# Altium PCB Webbie-V3.2.PcbDoc (part 3 of 3)
Units mil, origin at the board's own origin, x right, y up, seen from the top; angles counter-clockwise.
Board outline 3937.01 x 1574.8 mil, 4 copper layers (Top Layer, Layer 1, Layer 2, Bottom Layer), stack 61.865 mil thick; 123 components, 84 nets, 458 pads, 249 vias.
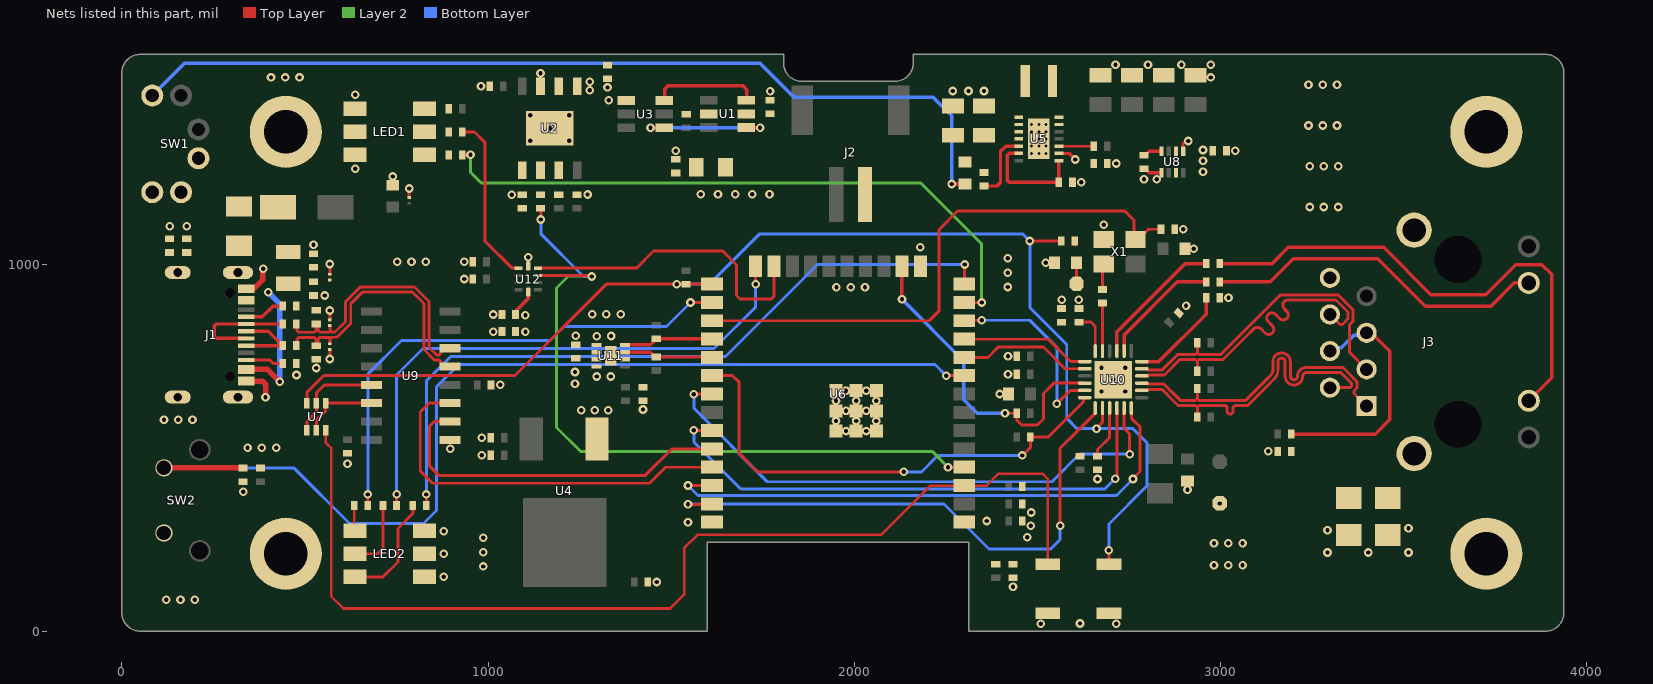
[diagram p4: the nets of this part, all layers, seen from the top]

## Via types
v1: diameter 23.62, hole 11.81, Top Layer to Bottom Layer, tented top, 249 vias

## Nets (pads, with @x,y where several pads share a name; then routed paths per layer and width w, separated by ;. In a path a pad name is that pad's centre, name@x,y a point inside that pad or via, vN(x,y) a via of type N, cw(c..) or ccw(c..) an arc to the next point about the centre after c; other vN are vias at no path point) (continued)
CLK50M: C38.2 R38.1 R41.1 TP2.1 X1.3 | length 127.2
  Top Layer w8: TP2.1@2606.63,948.6 2606.63,1005.37 C38.2@2607.01,1005.75 ; X1.3@2676.68,1002.54 2677.47,1001.75 R41.1@2677.47,933
DTR: U7.2 U7.4 U9.13 | length 272.8
  Top Layer w8: U7.4@505.41,548.13 505.41,572.77 531.01,598.36 U7.2@531.01,622.93 ; U7.2@531.21,623.14 531.21,651.12 552.63,672.53 U9.13@681.73,672.53
EN: C24.1 R27.1 SW3.2 U6.3 U7.6 | length 2894.6
  Top Layer w7: U7.6@556.6,548.13 556.6,515.63 560.7,511.53 571.7,500.52 571.7,95.3 605,62 1497,62 1535,100 1535,226.72 1571.28,263 2073,263 2207.62,397.62 U6.3@2300.16,397.62 2361.47,397.62 2393.75,429.91 2514.09,429.91 2528,416 SW3.2@2528,182.93
ETH2X_LED1: J3.10 R40.2 | length 1394.1
  Top Layer w9.5: R40.2@2997.51,1003.79 3140.62,1003.79 3184.74,1047.9 3445.22,1047.9 3574.12,919 3724,919 3806,1001 3877.12,1001 3904,974.12 3904,691.72 J3.10@3841.46,629.17
ETH2X_LED2: J3.11 R42.2 | length 950.2
  Top Layer w9.5: R42.2@2997.51,953.8 3135.44,953.8 3198.64,1017 3429,1017 3558.72,887.28 3738.28,887.28 3801.83,950.83 J3.11@3841.46,950.83
ETHERNET: R15.1 U6.14 | length 1994.8
  Top Layer w8: R15.1@831.45,343.5 v1(831.45,373.41) ; U6.14@2300.16,947.62 2301,948.46 v1(2301,1001)
  Bottom Layer w8: v1(831.45,373.41) 831.45,683.56 897.73,749.83 1648.49,749.83 1899.66,1001 v1(2301,1001)
FL: R19.1 U12.6 | length 465.5
  Top Layer w8: R19.1@929.5,1363.31 962.68,1363.31 991,1334.99 991,1065.73 1065.68,991.05 U12.6@1083.1,991.05
FULL_LED: U6.23 U12.4 | length 852.1
  Top Layer w8: U12.4@1136.25,991.05 1405,991.05 1451.65,1037.69 1640.63,1037.69 1678.29,1000.03 1678.29,916.71 1688.12,906.88 1772.92,906.88 1780.47,914.44 U6.23@1780.47,996.83
GND: C2.2 C3.1 C4.2 C5.2 C6.1 C7.1 C8.1 C9.2 C10.2 C11.1 C12.1 C13.1 C14.1 C15.1 C16.1 C17.1 C18.1 C19.1 C20.2 C21.1 C22.1 C23.1 C24.2 C25.1 C26.1 C27.1 C28.2 C29.2 C30.1 C31.2 C32.1 C33.2 C34.2 C35.2 C36.1 C37.1 C38.1 C39.1 C40.1 C41.1 C43.2 D1.2 D4.1 D6.1 D7.1 J1.A1B12 J1.B1A12 J3.8 LED2.2 LED2.4 LED2.6 pad.10 R2.1 R3.1 R4.2 R5.1 R7.1 R17.2 R18.2 R21.2 R24.1 R43.1 R45.2 R46.1 R50.1 SW1.1 SW2.2 SW3.1 SW4.1 TP3.1 U2.1 U2.3 U2.9 U3.1 U4.1 U5.2 U5.15 U6.1 U6.15 U6.38 U6.39 U6.39_10 U6.39_11 U6.39_12 U6.39_13 U6.39_14 U6.39_15 U6.39_16 U6.39_17 U6.39_18 U6.39_19 U6.39_20 U6.39_21 U6.40 U6.41 U6.42 U6.43 U6.44 U6.45 U6.46 U6.47 U8.1 U8.5 U9.1 U10.25 U11.1 U11.4 U11.9 U12.5 X1.2 | length 405.4
  Top Layer w8: D1.2@567.91,974.42 567.95,974.47 v1(568,1002.65) v1(568,1002.65) ; v1(568,743) D7.1@568,768.89 ; D6.1@568,850.15 v1(568,875.78) ; D4.1@784.33,1184.32 v1(784.33,1208.55) ; U5.2@2558.81,1304.66 2586.6,1304.66 v1(2603.44,1287.82) ; U8.1@2897.91,1310.27 2897.91,1332.01 2904.16,1338.27 v1(2911.69,1338.27)
  Top Layer w9.5: R17.2@2790.86,1262.63 2794.36,1262.63 2804.99,1252 U8.5@2838.85,1252
  Top Layer w15: J1.B1A12@339.29,683.19 339.87,682.6 383.39,682.6 392.22,673.78 v1(392.22,638.66) ; J1.A1B12@339.29,935.16 J1.A1B12@344.38,935.16 ; 361.93,936.92 384.14,959.13 384.14,987.58 v1(385.79,989.23)
  other v1: 2509,20 2715,20 2616,21 121,86 160,86 199,86 2433,121.46 1460.06,134.47 879,148.5 987,176.8 2982,180 3021,180 3060,180 879,211.5 3292,215 3403,215 3513,215 987,215.8 2982,240 3021,240 3060,240 987,254.8 2472.12,256.23 879,273 3292,276 3513,281.09 2482.04,288.11 1545.57,297.62 2361.47,300.88 2482.96,324.11 2997.51,348.8 331.11,380.46 2909.78,386.58 2663.76,415.33 615.86,457.42 982.92,480.49 3130.28,491 896.27,498.49 343.25,500.52 382.25,500.52 421.25,500.52 982.84,528.01 114.84,577 153.84,577 192.84,577 1254.33,603.5 1291.33,603.5 1328.33,603.5 1423.05,605.32 2397.01,647.66 2674.63,654.63 2739.37,654.63 1033.07,672.54 2707,687 1296.4,695.2 1335.25,695.2 476.67,699.52 2419.46,701.55 530.83,718.42 2674.63,719.37 2739.37,719.37 2419.46,750.63 1296.28,805.57 1335.74,805.91 1239.41,806.5 1013.8,817.83 1013.8,864.84 1284,865.44 1323,865.44 1362,865.44 2905.73,888.63 2565.99,905.03 2613.01,905.04 3021.54,910.31 553.65,916.64 1951,939 1990,939 2029,939 2418.56,939.81 934.46,961.52 2418.56,978.81 2522.96,1005.75 751.97,1008.53 790.97,1008.53 829.97,1008.53 934.45,1008.53 2418.56,1017.81 1109.68,1020.99 2926.62,1044.26 2180.3,1048.39 523.08,1054.69 2898.42,1097.35 130.39,1106 177.48,1106 2681.16,1109.85 3243,1158 3282,1158 3321,1158 2619.58,1225.93 2790.86,1233.78 2826.01,1233.78 739.47,1241.59 3243,1269.33 3282,1269.33 3321,1269.33 2714.81,1277 1512.45,1312.15 3040.05,1311.57 1115,1339.46 1221.2,1339.46 1168.04,1373.35 3240,1380.67 3279,1380.67 3318,1380.67 1115,1409 1221.2,1409 1329.37,1449.4 1769.89,1473.88 2269,1475 2311.51,1475 2354.01,1475 1277.66,1476.56 1325.83,1484.68 980.49,1487.85 3240,1492 3279,1492 3318,1492 1277.66,1499.72 407,1512 446,1512 485,1512 2973,1512 1143.04,1523.6 2712.91,1547 2801.63,1547 2893,1547 2973,1547
IO0: R30.1 R38.2 SW4.2 U6.25 U7.3 U10.14 | length 3582.1
  Top Layer w8: U7.3@505.41,622.93 505.41,652.35 551.42,698.35 1073.63,698.35 1322.77,947.5 1514.88,947.5 v1(1515,947.38) 1515.06,947.44 1539.94,947.44 R30.1@1540,947.5 ; R30.1@1540.12,947.38 U6.25@1611.18,947.38 ; v1(2478.83,1065.26) 2564.51,1065.26 R38.2@2564.88,1065.63 ; v1@2661.24,553.11 2661.24,553.83 2677.59,570.19 U10.14@2677.59,609.1 ; SW4.2@2695.12,183.05 v1@2695.12,220.88
  Bottom Layer w8: v1(1515,947.38) 1603.95,947.38 1741.57,1085 2459.09,1085 v1(2478.83,1065.26) 2479,1065.09 2479,884.01 2579.88,783.13 2579.88,581.36 2608.25,552.99 v1(2661.12,552.99) ; v1@2661.24,552.87 2760.68,552.87 2798.87,514.68 2798.87,396.87 2695,293 v1(2695,221)
IO4: R26.1 U6.26 | length 1378.9
  Top Layer w8: R26.1@671.45,343.5 v1(671.45,373.41) ; v1(1552.62,897.62) U6.26@1611.18,897.62
  Bottom Layer w8: v1(671.45,373.41) 671.45,701.45 763.5,793.5 1168.77,793.5 1207.54,832.27 1487.27,832.27 v1(1552.62,897.62)
IO13_RMII_EMAC_RX_ER: R39.1 U6.16 U10.10 | length 894.4
  Top Layer w8: v1@2410.4,594.18 v1(2411.21,594.99) R39.1@2443.51,595 ; R39.1@2443.19,594.68 2444.53,593.33 2444.53,575.19 2457.1,562.62 2499.12,562.62 2516.17,579.66 2516.17,649.05 2544.28,677.16 U10.10@2629.22,677.16
  Top Layer w9.5: v1(2130,906) 2130,996.36 U6.16@2130.47,996.83
  Bottom Layer w9.5: v1(2130,906) 2298.65,737.35 2298.65,631.77 2335.43,594.99 v1(2411.21,594.99)
IO16_OSC_EN: R45.1 U6.27 X1.1 | length 1554.6
  Top Layer w8: U6.27@1611.18,847.62 2204.62,847.62 2231.62,874.62 2231.62,1096.75 2281.87,1147 2738,1147 2763.3,1121.7 2763.3,1069.46 2782.92,1089.09 2795.1,1089.09 2803.36,1097.35 R45.1@2837.38,1097.35
IO18_RMII_MDIO: R36.1 U6.30 U10.12 | length 1348.4
  Top Layer w8: U6.30@1611.18,697.62 1667.35,697.62 1685.51,679.45 1685.51,484.89 1735.4,435 v1(2135,435) ; v1(2458,479.91) 2459.44,479.91 2480.5,500.96 R36.1@2480.5,529.91 2529.37,529.91 2625.23,625.76 2625.23,637.13 2625.88,637.79 U10.12@2629.22,637.79
  Bottom Layer w8: v1(2135,435) 2183,435 2227.91,479.91 v1(2458,479.91)
IO19_RMII_EMAC_TXD0: U6.31 U10.17 | length 1524
  Top Layer w8: v1(1561.9,647.1) 1610.66,647.1 U6.31@1611.18,647.62 ; U10.17@2736.53,609.22 2736.53,553.82 2751.5,538.85 v1(2751.5,483.44)
  Bottom Layer w8: v1(1561.9,647.1) 1561.9,608.5 1762.41,407.99 2539.55,407.99 2615.01,483.44 v1(2751.5,483.44)
IO21_RMII_EMAC_TX_EN: U6.33 U10.16 | length 1491.5
  Top Layer w8: v1(1561.9,548.26) 1610.55,548.26 U6.33@1611.18,547.62 ; v1(2712.13,416.52) 2712.13,420.74 2716.84,425.45 U10.16@2716.84,609.22
  Bottom Layer w8: v1(1561.9,548.26) 1561.9,516.09 1689.99,388 2683.62,388 v1(2712.13,416.52)
IO22_RMII_EMAC_TXD1: U6.36 U10.18 | length 1518.8
  Top Layer w8: v1(1545.57,397.62) U6.36@1607.68,397.62 ; U10.18@2756.21,609.22 2756.21,581.64 2779.54,558.32 2779.54,436.04 2760.92,417.42 v1(2760.92,415.33)
  Bottom Layer w8: v1(1545.57,397.62) 1572.98,370.21 2715.81,370.21 v1(2760.92,415.33)
IO23_RMII_MDC: U6.37 U10.13 | length 1543.6
  Top Layer w8: v1(1545.57,346.25) 1609.81,346.25 U6.37@1611.18,347.62 ; v1(2561.86,288.11) 2561.86,499.18 2610.07,547.39 ; 2610.12,547.39 2657.79,595.06 U10.13@2657.79,609.22
  Bottom Layer w8: v1(1545.57,346.25) 1546.32,347 2244.42,347 2367.42,224 2536.1,224 2561.86,249.76 v1(2561.86,288.11)
IO25_RMII_EMAC_RXD0: U6.10 U10.8 | length 365.2
  Top Layer w8: U6.10@2300.16,747.62 2364.62,747.62 2392.69,775.69 2516.17,775.69 2575.33,716.53 U10.8@2629.22,716.53
IO26_RMII_EMAC_RXD1: U6.11 U10.7 | length 354.5
  Top Layer w8: U6.11@2300.16,797.62 2300.78,797 2529.31,797 2590.09,736.21 U10.7@2629.22,736.21
IO27_RMII_EMAC_CRS_DV: U6.12 U10.11 | length 531.9
  Top Layer w8: U6.12@2302.78,845 2306.78,849 v1(2347.58,849) ; v1(2552.83,620.8) 2589.5,657.47 U10.11@2629.22,657.47
  Top Layer w9.5: U6.12@2300.16,847.62 U6.12@2302.78,845
  Bottom Layer w8: v1(2347.58,849) 2479,849 2552.83,775.17 v1(2552.83,620.8)
IO33: C10.1 R20.1 SW2.1 U6.9 | length 2854.7
  Top Layer w8: v1(2250.62,697.62) U6.9@2300.16,697.62
  Top Layer w9.5: C10.1@330.86,445.75 C10.1@331.11,445.5
  Top Layer w15: SW2.1@115.08,445.75 C10.1@330.86,445.75
  Bottom Layer w8: SW2.1@114.84,446 469.47,446 621.29,294.17 823.71,294.17 858.94,329.4 858.94,667.1 920.22,728.38 2219.87,728.38 v1(2250.62,697.62)
"LOW BATT": R9.1 U6.13 | length 1753.8
  Top Layer w8: R9.1@929.49,1300.32 929.58,1300.41 v1(951.91,1300.41) ; U6.13@2300.16,897.62 v1(2347.58,897.62)
  Layer 2 w8: v1(951.91,1300.41) 951.91,1252.93 981.11,1223.73 2181.19,1223.73 2347.58,1057.35 v1(2347.58,897.62)
NetC1_1: C1.1 R1.1 U1.5
NetC6_2: C6.2 J1.13 R7.2
NetC20_1: C20.1 U5.1 U5.13 | length 304.7
  Top Layer w9.5: U5.13@2448.57,1304.66 2422.7,1304.66 2416.8,1298.77 2416.8,1231.5 2422.37,1225.93 C20.1@2558.53,1225.93 2558.67,1226.07 U5.1@2558.67,1284.95 ; U5.1@2558.7,1284.97 U5.1@2558.81,1284.97
NetC39_2: C39.2 J3.4 J3.5 R44.1 | length 677.3
  Top Layer w9.5: R44.1@3192.5,538 3422,538 3462,578 3462,764 3424.91,801.09 3424.58,801.09 3410.87,814.8 J3.5@3398.54,814.8
  Bottom Layer w9.5: J3.4@3298.54,764.8 3307.26,773.52 3329.58,773.52 3364.67,808.61 3392.35,808.61 J3.5@3398.54,814.8
NetC40_2: "J3.Shield 1" "J3.Shield 2" C40.2 R46.2
NetD5_2: D5.2 FB1.2
NetF1_2: F1.2 FB1.1
NetJ1_A5: J1.A5 R2.2 | length 111.7
  Top Layer w10: J1.A5@339.29,858.39 383.39,858.39 412.5,887.5 R2.2@438.97,887.5
NetJ1_A6: J1.A6 J1.B6 R23.2 | length 215.7
  Top Layer w9.5: J1.B6@339.29,779.65 R23.2@439,779.65 399.63,819.02 J1.A6@339.29,819.02
NetJ1_A7: J1.A7 J1.B7 R22.2 | length 307.5
  Top Layer w9.5: J1.A7@339.29,799.33 257.25,799.33 251.69,804.89 251.69,832.72 257.66,838.7 R22.2@439,838.7
NetJ1_B5: J1.B5 R5.2 | length 103.7
  Top Layer w8: J1.B5@339.29,740.28 403.8,740.28 413.57,730.5 R5.2@438.98,730.5
NetL1_1: L1.1 U5.8 U5.9
NetL1_2: L1.2 U5.6 U5.7
NetLED1_2: LED1.2 R9.2
NetLED1_4: LED1.4 R19.2
NetLED1_6: LED1.6 R13.2
NetLED2_1: LED2.1 R15.2 | length 304.7
  Top Layer w8: LED2.1@636.97,148.5 712.96,148.5 753.71,189.25 753.71,280.71 794.45,321.45 R15.2@794.45,343.5
NetLED2_3: LED2.3 R25.2 | length 199.5
  Top Layer w8: LED2.3@636.97,211.5 698.5,211.5 712.96,225.96 R25.2@712.96,343.5
NetLED2_5: LED2.5 R26.2 | length 70.1
  Top Layer w8: R26.2@634.45,343.5 634.45,277.01 LED2.5@636.97,274.49
NetR3_2: R3.2 U1.2
NetR4_1: R4.1 U2.2
NetR10_2: R10.2 U2.6
NetR11_2: R11.2 U2.7
NetR14_1: R14.1 R24.2 U5.3 | length 94.3
  Top Layer w7: U5.3@2558.81,1324.34 R14.1@2653.1,1324.34
NetR17_1: R17.1 U8.4 | length 52.4
  Top Layer w9.5: R17.1@2790.86,1299.63 2794.36,1299.63 2804.99,1310.27 U8.4@2838.85,1310.27
NetR40_1: R40.1 U10.3 | length 373.2
  Top Layer w9.5: U10.3@2716.84,764.78 2716.88,764.82 2716.88,817 2903.67,1003.79 R40.1@2960.51,1003.79
NetR42_1: R42.1 U10.2 | length 327.9
  Top Layer w9.5: R42.1@2960.51,953.8 2881.78,953.8 2736.57,808.59 U10.2@2736.57,764.82 ; U10.2@2736.53,764.78 U10.2@2736.57,764.82
NetR43_2: R43.2 U10.24 | length 274.3
  Top Layer w9.5: U10.24@2784.78,736.21 2831.62,736.21 2960.5,865.09 R43.2@2960.5,910.31
NetR50_2: R50.2 U11.6
NetU1_1: U1.1 U3.4 | length 373.9
  Top Layer w9.5: v1(1443.18,1374.6) U3.4@1480.57,1374.6 ; U1.1@1705.2,1374.9 v1(1742.6,1374.9)
  Bottom Layer w9.5: v1@1443.48,1374.9 v1(1742.6,1374.9)
NetU1_3: U1.3 U3.6 | length 292
  Top Layer w9.5: U3.6@1480.57,1449.4 1482.85,1451.68 1482.85,1480.58 1492.07,1489.79 1694.75,1489.79 1705.69,1478.85 U1.3@1705.69,1450.19
nRST: C36.2 R37.1 U10.15 | length 145.5
  Top Layer w8: C36.2@2663.76,477.55 2663.76,495.79 2697.16,529.18 U10.15@2697.16,609.22
OR_3.3V: C11.2 C27.2 C41.2 LED1.1 LED1.3 LED1.5 R6.2 R8.2 SW1.2 SW1.5 U8.2 U8.7 U12.10 | length 75.7
  Top Layer w10: C27.2@1074.84,864.84 1078.84,868.84 1078.84,877.63 1109.59,908.38 1109.59,926 U12.10@1109.68,926.08
  other v1: 1101.86,817.83 1101.86,862.89 1064.48,1191.78 1271.57,1192.22 2951.9,1254.59 636.97,1262.31 2951.9,1284.15 2951.9,1313.72 636.97,1464.31
OSCIN: R41.2 U10.5 | length 131.2
  Top Layer w8: U10.5@2677.47,764.78 R41.2@2677.47,896
OUT/BATT+: C3.2 C19.2 C25.2 C43.1 J2.1 R1.2 R12.1 R16.2 U2.5 U5.10 U5.11 U11.2 U11.3
  other v1: 1237.03,675.49 1237.03,707.53 1580.69,1192.78 1627.64,1192.78 1674.59,1192.78 1721.55,1192.78 1768.5,1192.78
RST: R12.2 R16.1 SW1.3 U5.12 | length 2690.5
  Top Layer w9.5: R12.2@2354.01,1215.5 2389.57,1215.5 2399,1224.93 2399,1310 2413.34,1324.34 U5.12@2448.57,1324.34
  Top Layer w10: v1(2265.94,1221) R16.1@2302,1221
  Bottom Layer w10: SW1.3@83,1462.44 171.1,1550.54 1742.57,1550.54 1835.1,1458 2215,1458 2265.94,1407.06 v1(2265.94,1221)
RTS: U7.1 U7.5 U9.14 | length 209.9
  Top Layer w8: U7.5@531.01,548.13 531.01,576.05 556.6,601.65 556.6,622.13 557,622.53 U9.14@681.73,622.53
RX_N: J3.6 R35.1 U10.22 | length 897.4
  Top Layer w8: U10.22@2784.78,696.84 2799.37,696.84 2802.21,699.69 2846.64,699.69 2888.63,741.67 2931.81,741.67 2936.49,736.98 ; R35.1@2936.49,709.84 2936.49,736.98 ; J3.6@3298.54,864.8 3325.83,837.51 3332.46,837.51 3348.02,853.07 3348.02,871.21 3314.91,904.32 3195.85,904.32 3183.86,904.32 ccw(c3183.86,890.32) 3173.96,880.42 3180.75,873.64 cw(c3170.85,863.74) 3180.75,853.84 cw(c3170.85,863.74) 3160.95,853.84 3149.69,865.09 ccw(c3139.79,855.19) 3129.89,865.09 ccw(c3139.79,855.19) 3129.89,845.3 3141.15,834.04 cw(c3131.25,824.14) 3141.15,814.24 cw(c3131.25,824.14) 3121.35,814.24 3110.09,825.5 ccw(c3100.19,815.6) 3090.3,825.5 3067.67,802.87 3014.67,749.87 3006.47,741.67 2941.18,741.67 2936.49,736.98
RX_P: J3.3 R34.1 U10.23 | length 897.3
  Top Layer w8: U10.23@2784.78,716.53 2799.37,716.53 2802.21,713.69 2840.85,713.69 2882.83,755.67 2931.81,755.67 2936.49,760.35 ; R34.1@2936.49,787.49 2936.49,760.35 ; J3.3@3398.54,714.8 3351.61,761.74 3351.61,836.86 3362.02,847.27 3362.02,877.01 3320.71,918.32 3163.32,918.32 3000.67,755.67 2941.18,755.67 2936.49,760.35
RXD: U6.34 U9.2 | length 981.3
  Top Layer w8: U9.2@896.27,572.53 853.14,572.53 840.45,559.84 840.45,450.52 865.4,425.57 1429.26,425.57 1501.3,497.62 U6.34@1611.18,497.62
SCL: R33.1 U6.29 U11.7 | length 242.8
  Top Layer w9.5: U11.7@1374.23,761.84 1442.54,761.84 1455.75,748.63 1610.17,748.63 U6.29@1611.18,747.62
SDA: R32.1 U6.28 U11.8 | length 249.7
  Top Layer w9.5: U11.8@1374.23,781.53 1442.49,781.53 1451.5,790.54 1451.5,794.04 R32.1@1455.75,798.29 ; R32.1@1459.25,798.29 R32.1@1455.75,798.29 ; U6.28@1611.18,797.62 1610.52,798.29 R32.1@1455.75,798.29
STDBY: R6.1 R10.1 U6.4 U12.3 | length 2055.7
  Top Layer w8: U12.3@1136.25,971.36 1136.31,971.3 1279.92,971.3 v1(1282.77,968.45) ; v1(1144,1124) 1144,1152.56 R10.1@1146.44,1155 ; v1(2255.76,447.62) U6.4@2300.16,447.62
  Layer 2 w8: v1(1282.77,968.45) 1281.08,970.14 1219.47,970.14 1186.6,937.26 1186.6,556.4 1252,491 2212.38,491 v1(2255.76,447.62)
  Bottom Layer w8: v1(1144,1124) 1144,1085 1260.55,968.45 v1(1282.77,968.45)
TX_N: J3.2 R29.1 U10.20 | length 890.8
  Top Layer w8: U10.20@2784.78,657.47 2799.37,657.47 2802.21,660.31 2839.86,660.31 2883.82,616.35 2931.81,616.35 2936.5,611.67 ; R29.1@2936.49,584.53 2936.49,611.67 ; J3.2@3298.54,664.8 3353.29,664.8 3357.97,669.49 3357.97,676.12 3328.09,706 3276.74,706 3234.07,706 ccw(c3234.07,696.09) 3224.17,696.09 cw(c3200.26,696.09) 3200.26,672.19 cw(c3200.26,696.09) 3176.36,696.09 3176.36,735.72 ccw(c3166.45,735.72) 3166.45,745.63 ccw(c3166.45,735.72) 3156.54,735.72 3156.54,713.58 cw(c3120.69,713.58) 3146.15,688.33 cw(c3120.67,713.57) 3146.09,688.28 3130.09,672.28 3082.37,624.56 3074.17,616.35 3060.36,616.35 3041.74,616.35 ccw(c3041.74,608.35) 3033.74,608.35 3033.74,600.79 cw(c3025.8,600.79) 3017.87,600.79 3017.87,608.35 ccw(c3009.87,608.35) 3009.87,616.35 2989.99,616.35 2941.18,616.35 2936.49,611.67
TX_P: J3.1 R28.1 U10.21 | length 890.9
  Top Layer w8: U10.21@2784.78,677.16 2799.37,677.16 2802.21,674.31 2845.66,674.31 2889.62,630.35 2931.81,630.35 2936.5,635.04 ; R28.1@2936.5,662.18 2936.5,635.04 ; J3.1@3398.54,614.8 3364.13,649.22 3364.13,655.84 3371.97,663.69 3371.97,681.92 3333.89,720 3276.74,720 3234.07,720 ccw(c3234.07,696.09) 3210.17,696.09 cw(c3200.26,696.09) 3200.26,686.19 cw(c3200.26,696.09) 3190.36,696.09 3190.36,735.72 ccw(c3166.45,735.72) 3166.45,759.63 ccw(c3166.45,735.72) 3142.54,735.72 3142.54,713.58 cw(c3120.69,713.58) 3136.21,698.19 cw(c3120.67,713.57) 3136.17,698.15 3130.09,692.08 3068.37,630.35 3060.37,630.35 2955.99,630.35 2941.18,630.35 2936.5,635.04
TXD: U6.35 U9.3 | length 1081.2
  Top Layer w8: U9.3@896.27,622.53 838.67,622.53 814.78,598.65 814.78,437.09 847.96,403.92 1440.4,403.92 1484.1,447.62 U6.35@1611.18,447.62
USB_N: C13.2 D6.2 R22.1 U9.6 | length 738
  Top Layer w8: R22.1@476,838.7 478.29,836.41 478.29,820.86 482.97,816.17 502.09,816.17 502.15,816.12 525.96,816.12 530.64,820.81 530.64,838.59 C13.2@530.83,838.78 531.01,838.78 536.01,833.78 536.01,820.94 540.69,816.25 564.78,816.25 568,819.47 568,821.21 ; D6.2@568,834.41 568,821.21 ; U9.6@896.27,772.53 878.5,772.53 871.5,765.53 871.5,759.22 866.81,754.53 858.94,754.53 838.76,774.71 838.76,900.23 798.9,940.1 651.3,940.1 650.4,939.2 611,899.8 611,845.82 581.7,816.52 572.69,816.52 568,821.21
USB_P: C14.2 D7.2 R23.1 U9.5 | length 738
  Top Layer w8: R23.1@476,779.65 478.29,781.93 478.29,797.49 482.97,802.17 496.29,802.17 496.35,802.12 525.96,802.12 530.64,797.43 530.64,779.65 C14.2@530.83,779.46 531.01,779.46 536.01,784.46 536.01,797.57 540.69,802.25 565.32,802.25 568,799.58 568,797.84 ; D7.2@568,784.64 568,797.84 ; U9.5@896.27,722.53 878.5,722.53 871.5,729.53 871.5,735.84 866.81,740.53 853.14,740.53 824.76,768.91 824.76,894.44 793.1,926.1 657.1,926.1 656.2,925.2 625,894 625,840.03 587.5,802.52 572.69,802.52 568,797.84
VDDCR: C32.2 C33.1 U10.6 | length 117
  Top Layer w8: C32.2@2613,844 2645.75,844 2657.79,831.96 U10.6@2657.79,764.78
VUSB: C4.1 C5.1 D1.1 F1.1 J1.A4B9 J1.B4A9 | length 362.7
  Top Layer w15: J1.B4A9@339.29,714.69 397.27,714.69 v1(430.78,681.18)
  Bottom Layer w15: v1(399.63,925.64) 430.78,894.49 v1(430.78,681.18)
WIFI: R25.1 U6.24 | length 1525.3
  Top Layer w8: R25.1@749.96,343.5 750.06,343.6 750.06,373.41 v1(750.16,373.51) ; v1(1730.47,947.38) U6.24@1730.47,996.83
  Bottom Layer w8: v1(750.16,373.51) 749.96,373.71 749.96,699.83 822.13,772 1617,772 1730.47,885.47 v1(1730.47,947.38)
pads on no net: J1.7 J1.8 J1.A8 J1.B8 J2.3 J2.4 J3.7 J3.MH1 J3.MH2 SW2.3 SW2.4 U1.4 U3.2 U3.5 U5.14 U6.7 U6.17 U6.18 U6.19 U6.20 U6.21 U6.22 U6.32 U8.8 U9.7 U9.8 U9.9 U9.10 U9.11 U9.12 U9.15 U10.4

## Polygon pours and split planes (outlines as drawn)
GND on Top Layer "NONET_L-01_P-001" (solid, remove dead copper, pour order 47): 10,50 50,10 1590,10 1590,255 2323.68,255 2325,253.68 2325,10 3890,10 3925,45 3925,1525 3885,1565 2235.39,1565 2149.79,1479.4 1806.6,1479.4 1726,1560 50,1560 10,1520
OUT/BATT+ on Top Layer "NONET_L-01_P-001" (solid, pour order 38): 1037.57,1215 1057.78,1235.22 1104.85,1235.22 1104.85,1282.46 1028.46,1282.46 1004.5,1258.5 1004.5,1090.07 1037.57,1057 2034.76,1057 2048.68,1070.93 2048.68,1243.18 2009.32,1243.18 2009.32,1117.2 2009.31,1085 1061.54,1085 1037.57,1108.97
OUT/BATT+ on Top Layer "NONET_L-01_P-001" (solid, pour order 37): 1500.06,1242 1500.06,1192.97 1515.03,1178 1838.32,1178 1857.1,1196.78 1857.1,1276.1 1879.76,1298.76 2009.32,1298.76 2009.32,1117.2 2048.68,1117.2 2048.68,1222.83 2091.85,1266 2341.51,1266 2341.51,1243.5 2366.51,1243.5 2366.51,1316.5 2389.31,1339.31 2460.39,1339.31 2460.39,1368.44 2389.57,1368.44 2384.01,1374 2239,1374 2198,1333 1858.77,1333 1812.76,1286.99 1812.76,1220.69 1594.33,1220.69 1588.02,1227 1588.02,1292 1548.02,1292 1548.02,1267 1541.12,1260.11 1499.95,1260.11 1499.95,1242.11
3.3V_ESP on Top Layer "NONET_L-01_P-001" (solid, pour order 34): 2735.74,1026.16 2791.97,1026.16 2827.57,1061.76 2857.57,1061.76 2857.57,1026.76 2809.72,978.91 2735.74,978.91
NetC40_2 on Top Layer "NONET_L-01_P-001" (solid, pour order 33): 3314.99,393 3437,393 3480.58,436.58 3480.58,524.15 3489.63,533.21 3567.29,533.21 3576.59,523.91 3576.59,363 3546.59,333 3314.99,333
B- on Top Layer "NONET_L-01_P-001" (solid, pour order 32): 1401.44,1329.85 1407.59,1336 1617,1336 1626.07,1345.07 1626.07,1387.1 1578.04,1387.1 1574.88,1383.94 1528.67,1383.94 1528.67,1361.82 1522.12,1355.27 1407.59,1355.27 1401.44,1361.42 1401.44,1386.8 1353.41,1386.8 1353.41,1175.59 1411.8,1117.2 1969.95,1117.2 1969.95,1266.8 1930.58,1266.8 1930.58,1174.58 1918,1162 1438.59,1162 1401.44,1199.15
AVDD on Top Layer "NONET_L-01_P-001" (solid, pour order 27): 2770.57,642.5 2770.57,633.08 2784.78,633.08 2813.96,603.89 2813.96,546.22 2798.75,531 2798.75,455.89 2927.28,455.89 2927.28,536.58 2821.36,642.5
NetR50_2 on Top Layer "NONET_L-01_P-001" (solid, pour order 31): 1360.45,748.06 1360.45,736.25 1399.58,736.25 1410.55,725.28 1410.55,657.36 1435.55,657.36 1435.55,730.13 1417.62,748.06
AVDD on Top Layer "NONET_L-01_P-001" (solid, pour order 29): 2784.32,807.09 2841.86,807.09 2874.7,839.93 2857.02,857.61 2830.52,831.11 2779.24,831.11 2751.5,803.38 2751.5,745.86 2760.92,745.86 2760.92,783.7
NetL1_2 on Top Layer "NONET_L-01_P-001" (solid, pour order 22): 2547,1378.68 2581.93,1378.68 2581.93,1517.27 2553.89,1545.31 2528.3,1545.31 2528.3,1456.7 2547,1438
NetL1_1 on Top Layer "NONET_L-01_P-001" (solid, pour order 23): 2460.39,1378.68 2424.98,1378.68 2424.98,1516.79 2453.5,1545.31 2479.09,1545.31 2479.09,1456.7 2460.39,1438
OR_3.3V on Top Layer "NONET_L-01_P-001" (solid, pour order 19): 2911.69,1270.56 2940.93,1241.32 2987.9,1241.32 2987.9,1326.02 2945.61,1326.02 2911.91,1292.53 2887.29,1292.53 2884.13,1295.69 2884.13,1323.46 2872.32,1323.46 2872.32,1238.81 2884.13,1238.81 2884.13,1266.36 2888.33,1270.56
+3V3_BATT on Top Layer "NONET_L-01_P-001" (solid, pour order 6): 2944.18,1418 2961,1418 2961,1458 2642.27,1458 2642.27,1407.27 2603.44,1368.44 2547,1368.44 2547,1339.31 2621.14,1339.31 2627.44,1345.61 2674.42,1345.61 2681.77,1338.27 2681.77,1311.59 2699.77,1311.59 2699.77,1338.27 2726.05,1364.55 2826.01,1364.55 2852.63,1337.92 2852.63,1297.08 2864.45,1297.08 2864.45,1338.27
NetC1_1 on Top Layer "NONET_L-01_P-001" (solid, pour order 4): 1632.5,1400.09 1641.37,1391.23 1641.37,1308.35 1628.02,1295 1628.02,1242 1668.02,1242 1668.02,1415.16 1658.67,1424.5 1532.23,1424.5 1528.67,1420.94 1528.67,1402.94 1531.52,1400.09
VUSB on Top Layer "NONET_L-01_P-001" (solid, pour order 0): 545.04,962.64 535.58,972.09 535.58,1002.65 510.58,1002.65 510.58,984.65 494.21,968.27 426.47,968.27 373.67,915.47 316.65,915.47 316.65,891.85 383.6,891.85 420.65,928.9 487.48,928.9 503.21,944.64 534.8,944.64 544.9,954.74 572.63,954.74 572.63,962.61 572.61,962.64
NetF1_2 on Top Layer "NONET_L-01_P-001" (solid, pour order 2): 487.48,1015.52 487.48,1080.02 284.1,1080.02 284.1,1024.9 411.17,1024.9 420.55,1015.52
+5V_OUT on Top Layer "NONET_L-01_P-001" (solid, pour order 1): 534.53,1191.48 534.53,1093 789.06,1093 789.06,1172.51 757.01,1172.51 756.97,1172.55 651.88,1172.55 632.95,1191.48
GND on Layer 1 "NONET_L-01_P-001" (solid, remove dead copper, pour order 35): 50,10 1590,10 1590,255 2325,255 2325,10 3890,10 3925,45 3925,1525 3885,1565 2235.39,1565 2149.79,1479.4 1806.6,1479.4 1726,1560 50,1560 10,1520 10,50
AVDD on Layer 2 "NONET_L-01_P-001" (solid, pour order 43): 2809.04,542.04 2816.45,549.45 2823.38,549.45 2953.45,549.45 2963.09,559.09 2963.09,631.45 2995.06,663.42 2995.06,706.14 2970.59,730.6 2970.59,802.15 2965.65,807.09 2825.36,807.09 2821.36,811.1 2821.36,831.11 2825.79,835.54 2985.46,835.54 2993.99,827.01 2993.99,763.36 3027,730.35 3027,643.42 2995.07,611.5 2995.07,558.75 3003.32,550.5 3134.95,550.5 3141.31,544.14 3141.31,528.03 3136.28,523 3021.07,523 3014.17,516.11 3014.17,470.83 3092,393 3731,393 3759,421 3759,1062.45 3780.55,1084 3871.05,1084 3882,1073.06 3882,1019.03 3872.24,1009.27 3816.41,1009.27 3795,987.85 3795,581.34 3811.34,565 3868,565 3882,551 3882,501 3869,488 3814.22,488 3801,474.78 3801,405 3759,363 3075.48,363 2982.44,456.04 2982.44,516.91 2976.35,523 2816,523 2809.04,529.96
OUT/BATT+ on Layer 2 "NONET_L-01_P-001" (solid, pour order 41): 1223.33,662.93 1251.83,662.93 1251.83,728.38 1401.6,728.38 1426.58,753.37 1426.58,1057.95 1546.63,1178 1780.47,1178 1780.47,1206 1778.47,1208 1537,1208 1399.58,1070.58 1399.58,761.84 1392.2,754.46 1234.83,754.46 1223.33,742.96
+5V_OUT on Layer 2 "NONET_L-01_P-001" (solid, pour order 36): 1046,1262.97 1067.64,1241.33 1316.33,1241.33 1320.1,1245.1 1320.1,1271.8 1316.45,1275.45 1093.69,1275.45 1081.25,1287.89 1081.25,1460 1081.25,1550.54 677.38,1550.54 660,1533.15 660,623 701,582 1149.33,582 1149.33,625 728,625 706.12,646.88 706.12,1045.16 723.96,1063 777,1063 789.06,1075.06 789.06,1163.51 780.05,1172.51 714.3,1172.51 696,1190.81 696,1511 708,1523 1040,1523 1046,1517
GND on Bottom Layer "NONET_L-01_P-001" (solid, remove dead copper, pour order 48): 10,50 50,10 1590,10 1590,255 2325,255 2325,10 3890,10 3925,45 3925,1525 3885,1565 2235.39,1565 2149.79,1479.4 1806.6,1479.4 1726,1560 50,1560 10,1520
OR_3.3V on Bottom Layer "NONET_L-01_P-001" (solid, pour order 45): 1434.12,1217.43 1489.55,1162 2510,1162 2540,1192 2910,1192 2939.34,1221.34 2939.34,1326.02 2966.75,1326.02 2966.75,1207.06 2924.69,1165 2554.38,1165 2522.34,1132.96 1463.17,1132.96 1417.79,1178.35 951.91,1178.35 951.91,1142.65 1117,977.57 1117,806.5 1081.29,806.5 1081.29,960.74 909.06,1132.96 909.06,1178.35 825.1,1262.31 660,1262.31 660,1208.55 188.55,1208.55 187.77,1207.77 187.77,1168.8 187.91,1168.66 130.39,1168.66 130.39,1228.66 177.48,1275.75 177.48,1322 240,1322 240,1260 247,1253 616.22,1253 616.22,1484 660,1484 660,1305 834,1305 921.57,1217.43

## Other copper
Top Layer:
  rectangle net 3.3V_ESP: 2408.5,259.59 2433.5,313.11
  rectangle net 3.3V_ESP: 2798.75,311 2870.4,403.92
  region net 3.3V_ESP: 2401.11,542.41 2401.11,517.41 2452.5,517.41 2452.5,542.41
  rectangle net 3.3V_ESP: 2603.26,404.13 2628.26,449.55
  rectangle net 3.3V_ESP: 2373.5,109.42 2398.5,154.5
  region net 3.3V_ESP: 1552.5,1020.57 1527.5,1020.57 1527.5,975.5 1552.5,975.5
  region net 3.3V_ESP: 1471.75,874.29 1446.75,874.29 1446.75,826.29 1471.75,826.29
  rectangle net 3.3V_ESP: 1446.75,666.17 1471.75,720.63
  rectangle net 3.3V_ESP: 1362.73,598.61 1387.73,638.49
  region net 3.3V_ESP: 628.5,551.46 603.5,551.46 603.5,513.5 628.5,513.5
  rectangle net 3.3V_ESP: 365.62,380.45 390.62,417.49
  rectangle net +3V3_USB: 2852.63,1199.19 2900.01,1221.34
  rectangle net +3V3_USB: 2852.63,1199.19 2864.45,1265.19
  region net OR_3.3V: 1105.51,1201 1053.28,1201 1053.28,1183 1105.51,1183
  rectangle net OR_3.3V: 1230.54,1183 1282.77,1201
  region net GND: 2888.13,853.37 2922.94,888.18 2905.26,905.85 2870.45,871.05
  region net AVDD: 2990.78,833.42 2964.45,833.42 2964.45,775.01 2990.78,775.01
  region net AVDD: 3023.56,696.7 3023.56,723.03 2965.14,723.03 2965.14,696.7
  region net AVDD: 3023.57,649.05 3023.57,675.37 2965.15,675.37 2965.15,649.05
  region net AVDD: 3117.44,550.84 3117.44,524.52 3164.31,524.52 3164.31,550.84
  rectangle net AVDD: 2964.49,538.61 2990.82,597.03
  rectangle net OUT/BATT+: 1223.33,662.93 1251.83,754.46
  rectangle net OUT/BATT+: 1223.33,736.46 1310.06,754.46
  rectangle net OUT/BATT+: 1282.5,736.25 1310.06,767.75
  rectangle net +5V_OUT: 1034.88,465.64 1149.33,633.53
  rectangle net +5V_OUT: 1231.23,1235.22 1320,1282.46
  rectangle net +5V_OUT: 1032.53,1464.23 1104.85,1534.07
  rectangle net NetR4_1: 1193.04,1536.72 1338.32,1554.72
  region net GND: 1308.78,805.57 1283.78,805.57 1283.78,775.62 1308.78,775.62
  region net GND: 1033.08,660.04 1033.08,685.04 1000.03,685.04 1000.03,660.04
  rectangle net GND: 117.83,1061.96 189.84,1106
  rectangle net GND: 1319.5,686.38 1351,817.07
  rectangle net GND: 518.33,866.78 568,884.78
  rectangle net GND: 518.33,718.42 543.33,751.46
  region net GND: 553.65,907.64 553.65,925.64 514.08,925.64 514.08,907.64
  region net GND: 535.58,1054.69 510.58,1054.69 510.58,1021.65 535.58,1021.65
  region net GND: 751.97,1241.59 726.97,1241.59 726.97,1208.55 751.97,1208.55
  region net GND: 1155.54,1523.6 1130.54,1523.6 1130.54,1464.23 1155.54,1464.23
  region net GND: 934.45,1021.03 934.45,996.03 967.49,996.03 967.49,1021.03
  region net GND: 2198.19,1048.39 2162.76,1048.39 2162.76,967.31 2198.19,967.31
  region net GND: 2419.46,763.13 2419.46,738.13 2452.51,738.13 2452.51,763.13
  region net GND: 2419.46,714.05 2419.46,689.05 2452.5,689.05 2452.5,714.05
  region net GND: 2397.01,660.16 2397.01,635.16 2430.05,635.16 2430.05,660.16
  rectangle net GND: 2494.14,8 2728.86,65.21
  region net GND: 2708.72,1129.1 2653.6,1129.1 2653.6,1069.46 2708.72,1069.46
  region net GND: 982.91,492.99 982.91,467.99 1015.96,467.99 1015.96,492.99
  region net GND: 982.84,540.51 982.84,515.51 1015.88,515.51 1015.88,540.51
  rectangle net GND: 1238.03,465.64 1344.64,617.44
  region net GND: 2373.17,279.91 2373.17,315.34 2270.63,315.34 2270.63,279.91
  rectangle net GND: 2651.26,403.26 2676.26,448.37
  rectangle net IO0: 2661.14,166.79 2728.86,232.46
  region net GND: 3021.54,897.81 3021.54,922.81 2988.5,922.81 2988.5,897.81
  rectangle net GND: 3276.45,199 3528.46,293
  region net GND: 2619.58,1213.43 2619.58,1238.43 2586.53,1238.43 2586.53,1213.43
  region net GND: 2714.81,1264.5 2714.81,1289.5 2681.77,1289.5 2681.77,1264.5
  region net GND: 3130.28,503.5 3130.28,478.5 3163.33,478.5 3163.33,503.5
  rectangle net GND: 2449,243.92 2494.14,407.13
  region net GND: 2482.04,288.11 2482.04,313.11 2449,313.11 2449,288.11
  rectangle net GND: 2420.5,108.89 2445.5,154.5
  rectangle net GND: 2897.28,386.58 2922.28,419.62
  region net GND: 2522.96,1018.25 2522.96,993.25 2556,993.25 2556,1018.25
  region net GND: 2578.49,905.03 2553.49,905.03 2553.49,871.99 2578.49,871.99
  region net GND: 2625.5,905.04 2600.5,905.04 2600.5,872 2625.5,872
  region net GND: 2926.62,1031.76 2926.62,1056.76 2893.58,1056.76 2893.58,1031.76
  region net GND: 2898.42,1084.85 2898.42,1109.85 2865.38,1109.85 2865.38,1084.85
  rectangle net GND: 2778.36,1218.74 2844.76,1265.19
  region net GND: 3040.05,1299.07 3040.05,1324.07 3007.01,1324.07 3007.01,1299.07
  rectangle net GND: 2642.22,1497.98 2990,1562
  rectangle net GND: 2239,1414 2384.01,1489.25
  rectangle net GND: 1103.77,985.71 1115.58,1033
  region net GND: 1013.8,877.34 1013.8,852.34 1046.84,852.34 1046.84,877.34
  region net GND: 1013.8,830.33 1013.8,805.33 1046.85,805.33 1046.85,830.33
  region net GND: 1251.83,806.5 1226.83,806.5 1226.83,773.46 1251.83,773.46
  rectangle net GND: 1283.78,686.64 1308.78,728.38
  rectangle net GND: 1410.55,592.94 1435.55,638.36
  rectangle net GND: 1545.57,279.91 1640.71,315.34
  region net GND: 1460.06,121.97 1460.06,146.97 1427.02,146.97 1427.02,121.97
  rectangle net GND: 794.45,128.82 892,294.17
  rectangle net GND: 603.5,457.42 628.5,494.5
  rectangle net GND: 883.68,485.37 908.68,533.53
  region net GND: 488.6,687.49 488.6,743 464.62,743 464.62,687.49
  region net GND: 568,875.78 568,915.44 466.97,915.44 466.97,875.78
  rectangle net GND: 318.61,380.46 343.61,417.5
  region net GND: 934.46,974.02 934.46,949.02 967.5,949.02 967.5,974.02
  region net GND: 1524.96,1312.15 1499.96,1312.15 1499.96,1279.11 1524.96,1279.11
  region net GND: 1782.39,1473.88 1757.39,1473.88 1757.39,1440.84 1782.39,1440.84
  region net GND: 1329.37,1461.9 1329.37,1436.9 1377.43,1436.9 1377.43,1461.9
  region net GND: 1290.19,1464.23 1290.19,1511.48 1231.23,1511.48 1231.23,1464.23
  rectangle net NetR4_1: 1183.83,1487.85 1201.83,1554.72
  rectangle net GND: 1313.32,1484.68 1338.32,1517.72
  region net GND: 980.49,1500.35 980.49,1475.35 1013.53,1475.35 1013.53,1500.35
  rectangle net OR_3.3V: 605.48,1250 668.47,1476
  rectangle net CLK50M: 2592.01,988.04 2676.68,1023.04
  rectangle net CLK50M: 2593.01,1005.75 2611.01,1078.26
  rectangle net +5V_OUT: 1034.88,467.99 1117.83,540.51
  rectangle net 3.3V_ESP: 867.5,661.53 970.84,683.53
  rectangle net 3.3V_ESP: 986.5,948.31 1093.35,974.72
  rectangle net 3.3V_ESP: 986.49,948.31 1004.49,1021.03
  rectangle net OR_3.3V: 1065.85,805.33 1116.03,877.34
  rectangle net 3.3V_ESP: 2471.51,582.5 2489.51,647.66
  region net nRST: 2676.26,468.55 2676.26,486.55 2603.26,486.55 2603.26,468.55
  rectangle net 3.3V_ESP: 2471.51,647.66 2489.5,763.13
  rectangle net 3.3V_ESP: 2412,335.12 2430,407.13
  rectangle net 3.3V_ESP: 2300.16,329.91 2430,360.12
  rectangle net 3.3V_ESP: 2412,288.11 2430,360.12
  rectangle net 3.3V_ESP: 603.5,513.5 710.5,531.5
  rectangle net NetC39_2: 3183.5,478.49 3201.5,550.5
  rectangle net ALRT: 1362,657.49 1387.73,728.38
  rectangle net RST: 2302,1206.5 2366.51,1224.5
  rectangle net VDDCR: 2553.49,834.99 2625.5,853
  rectangle net EN: 2373.5,173.5 2528,191.5
  rectangle net NetR14_1: 2644.77,1264.5 2662.44,1336.51
  rectangle net +3V3_USB: 1208.83,121.97 1408.02,364.06
  rectangle net IO33: 318.61,436.5 390.62,454.49
  rectangle net STDBY: 1080.51,1146 1155.44,1164
  rectangle net CHRG: 1180.54,1146 1255.54,1163.91
  rectangle net NetR11_2: 1181.23,1183 1204.85,1282.46
  rectangle net NetR10_2: 1131.23,1183 1154.85,1282.46
  rectangle net NetR3_2: 1705.2,1403.84 1782.39,1421.84
  rectangle net +5V_OUT: 1032.53,1478.34 1093.04,1496.34
  rectangle net NetLED1_2: 825.94,1287.82 901.49,1312.82
  rectangle net NetLED1_4: 825.95,1350.81 901.5,1375.81
  rectangle net NetLED1_6: 825.95,1413.8 901.5,1438.8
  rectangle net NetD5_2: 284.1,1131.98 426.26,1187.1
  rectangle net NetC6_2: 117.83,979.25 189.84,1042.96
  rectangle net NetC6_2: 117.04,639.1 152.48,979.25
  rectangle net NetC6_2: 134.76,621.38 317.04,656.81
  rectangle net NetC6_2: 134.76,961.54 317.04,996.97
Layer 1:
  rectangle net 3.3V_ESP: 2466.1,521.44 2493.01,763.13
  rectangle net 3.3V_ESP: 1008,948.36 1062.59,973.29
Layer 2:
  rectangle net NetC40_2: 3480.58,436.58 3576.17,1142.41
Bottom Layer:
  rectangle net NetC40_2: 3481,437.22 3576.59,1143.05

## Silkscreen, mask and mechanical layers (free items; w line width, h text height)
Top Overlay:
  text "POWER" at 56.92,1509.81 h30
  text "BATT CON" at 2195.87,1256.32 h30 r90
  text "+" at 2160.74,1192.63 h50
  text "+" at 2160.74,1138.56 h50
  text "CLK" at 2488.02,933.6 h30
  text "AVDD" at 3037.02,447.98 h30
  text "GND" at 3035.49,333.8 h30
  text "RESET" at 50.02,135 h30
  text "BOOT" at 2790,62.02 h30 r90
  text "RESET" at 2621,49.02 h30 r90
  text "WEBBIE V3.2" at 2884.4,42.01 h40
  text "2025" at 3419.69,42.01 h40
Board Outline:
  lines w10: 3887.01,0 ccw(c3887.01,50) 3937.01,50 ; 3887.01,0.22 2311.67,0.22 2311.67,242.23 1597.76,242.23 1597.76,0 50,0 cw(c50,50) 0,50 0,1524.8 cw(c50,1524.8) 50,1574.8 1807.08,1574.8 cw(c1807.08,1574.78) 1807.1,1574.78 1807.1,1551 ccw(c1857.1,1551) 1857.1,1501 2110.39,1501 ccw(c2110.39,1551) 2160.39,1551 2160.39,1574.8 ; 3937.01,1063.68 3937.01,50 ; 3937.01,1064 3937.01,1524.8 ccw(c3887.01,1524.8) 3887.01,1574.8 3817.37,1574.8 ; 2160.39,1574.8 ccw(c2160.39,1574.8) 2160.39,1574.8 ; 2160.39,1574.8 3817.37,1574.8 ; 3817.37,1574.8 ccw(c3817.37,1574.8) 3817.37,1574.8 ; 3817.37,1574.8 ccw(c3817.37,1574.8) 3817.37,1574.8 ; 3937.01,50 3937.01,50